# Altium PCB smoothPCB.pcbdoc (part 1 of 2)
Units mm, origin at the board's own origin, x right, y up, seen from the top; angles counter-clockwise.
Board outline 116.3 x 89.84 mm, 2 copper layers (Top Layer, Bottom Layer); 42 components, 86 nets, 257 pads, 168 vias.
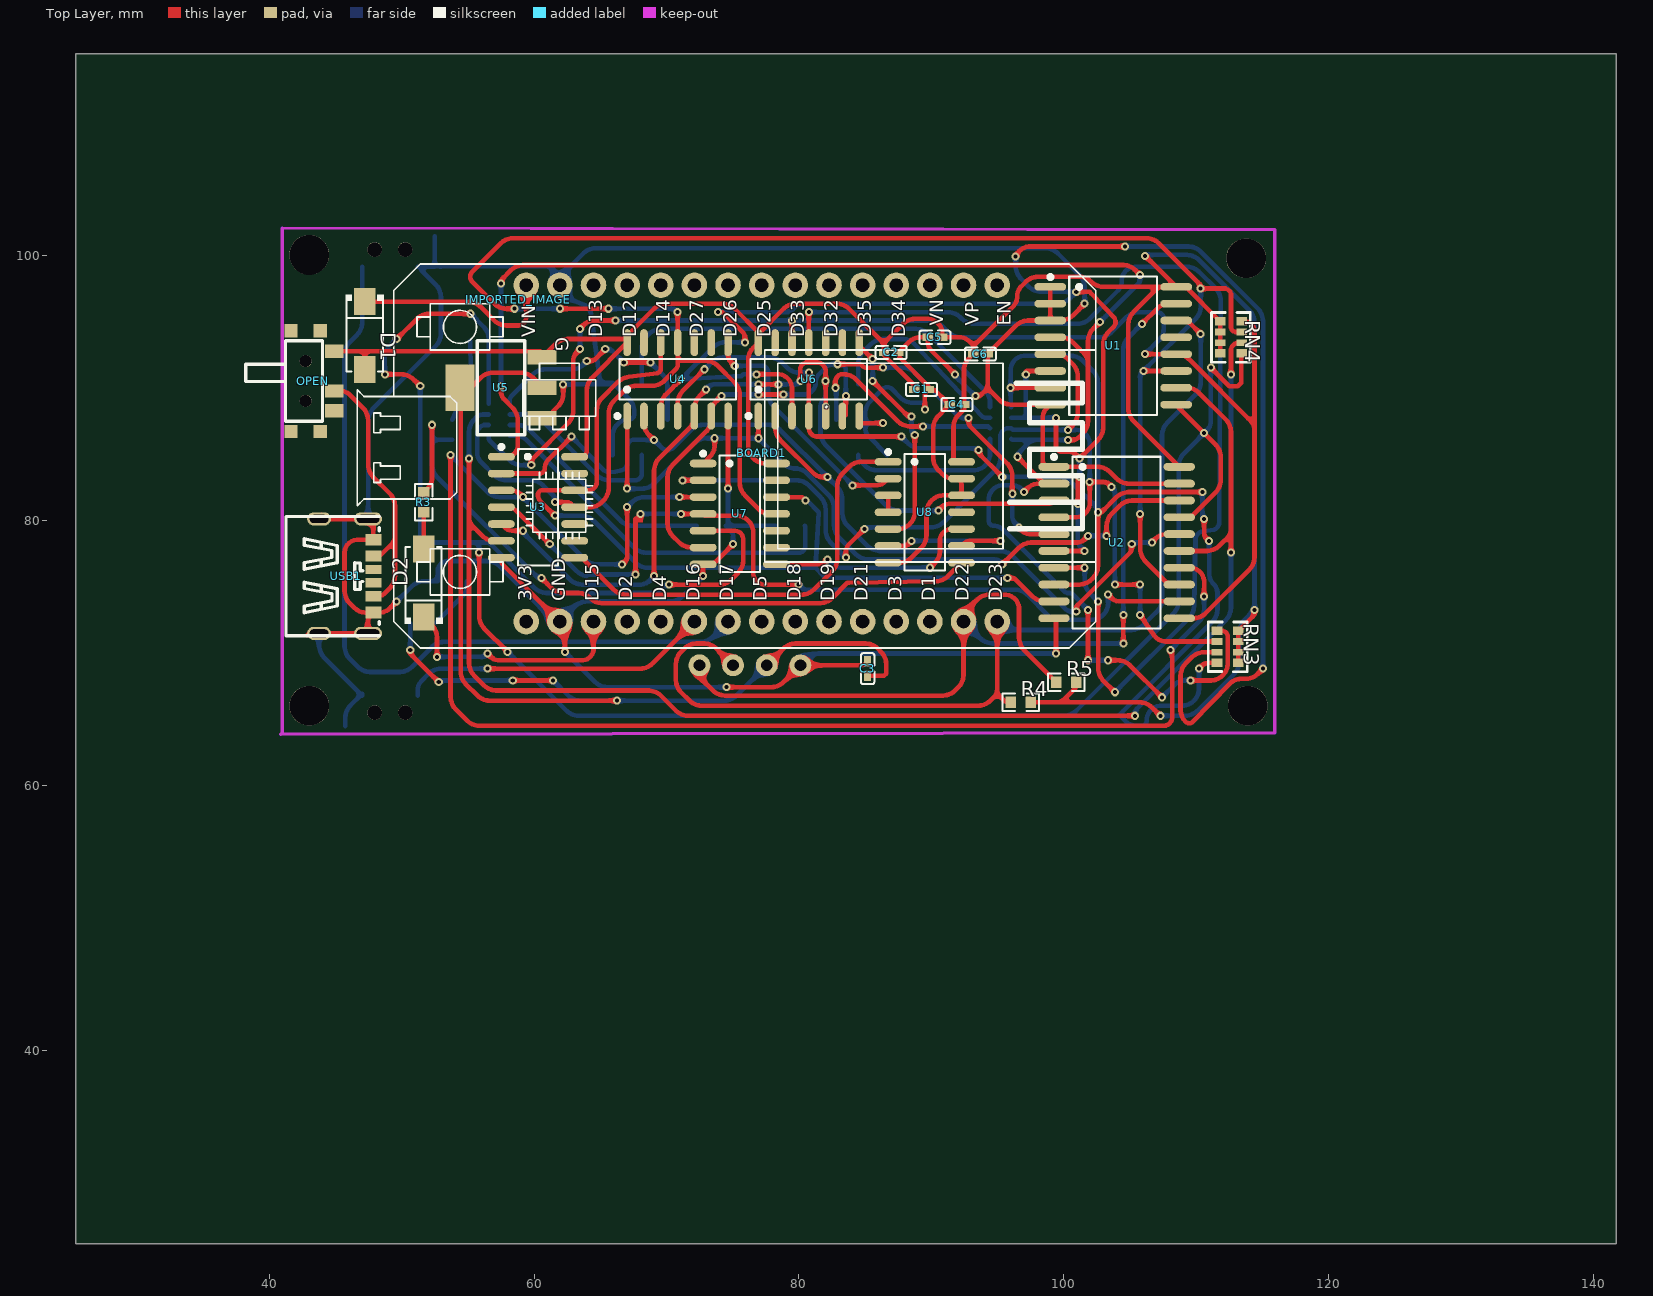
[diagram p0: Top Layer view]
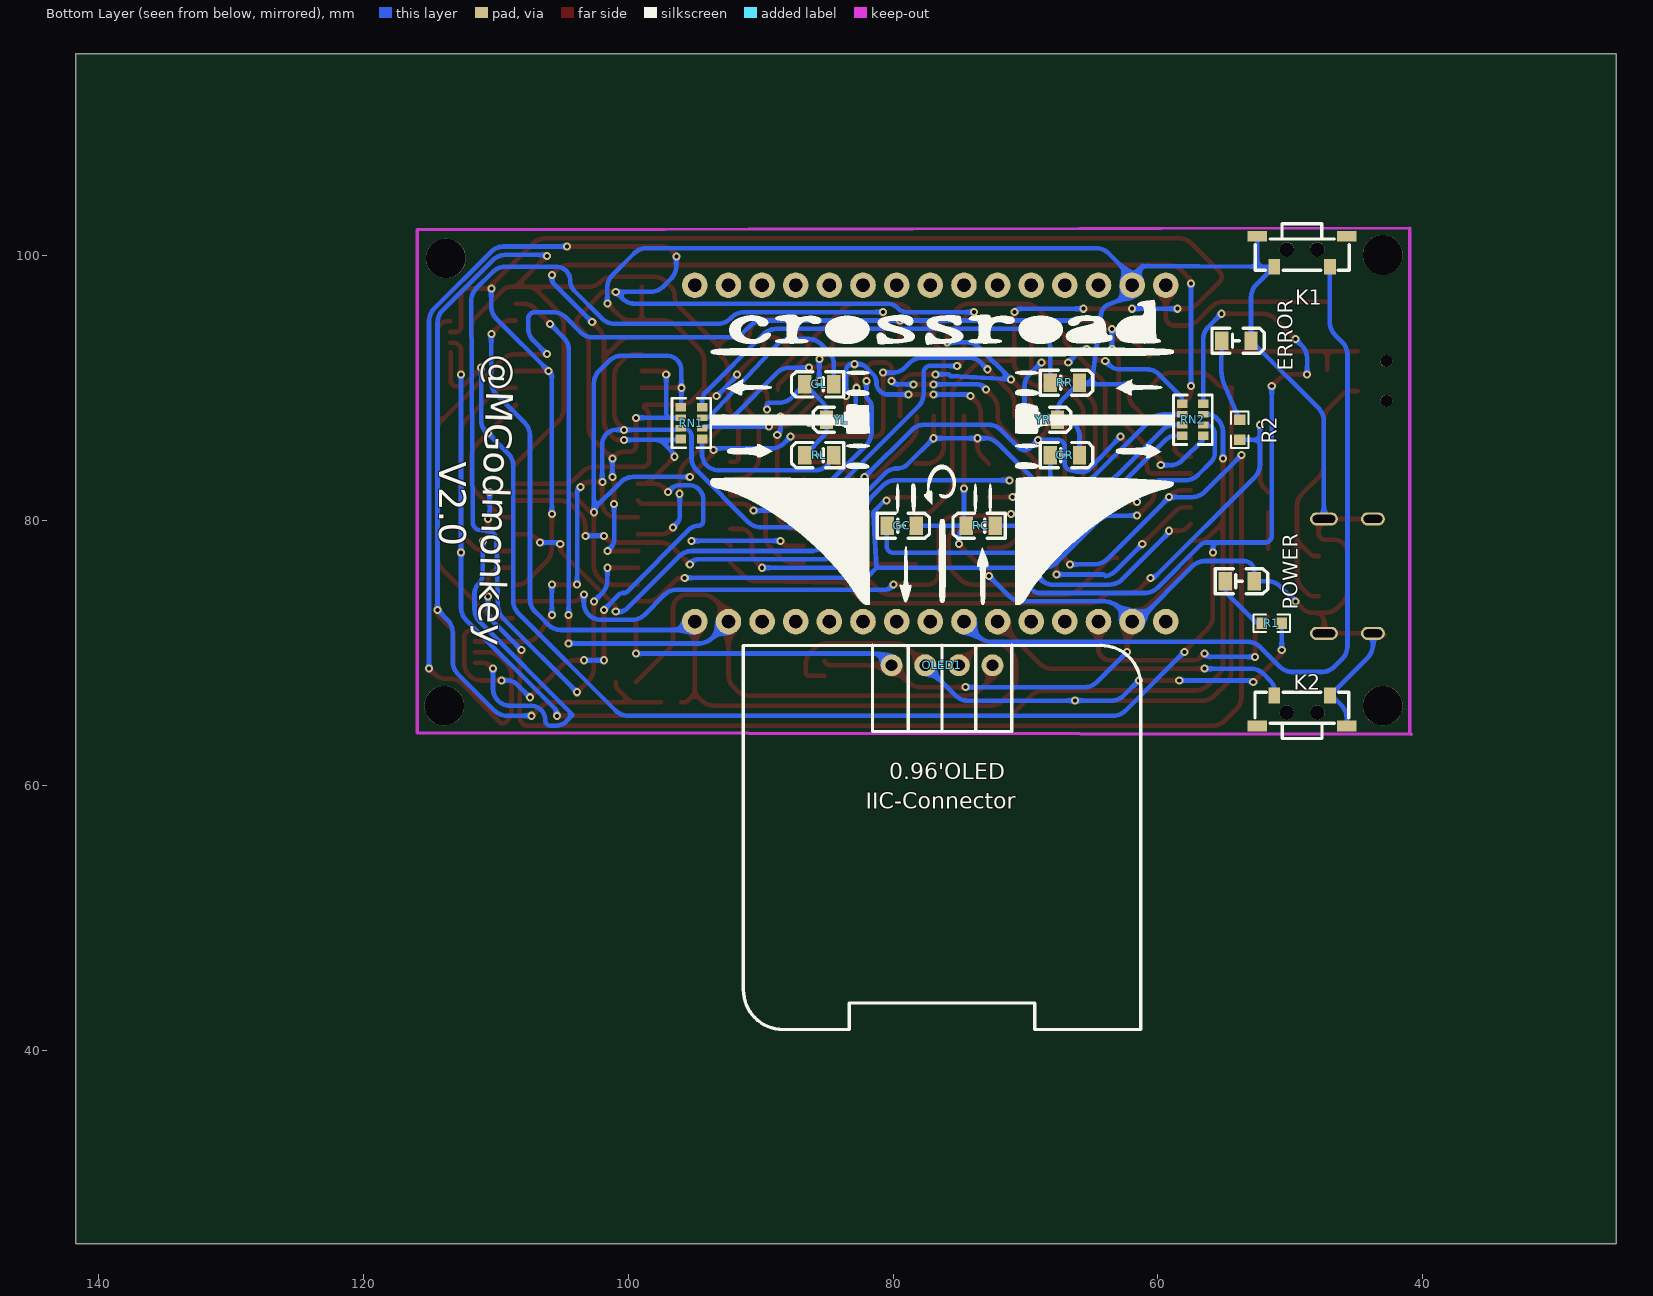
[diagram p1: Bottom Layer view, seen from below]

## Layer stack, top to bottom
Top Layer: signal copper (thickness not stored)
Dielectric: dielectric 0.32, FR-4, Dk 4.8
Bottom Layer: signal copper (thickness not stored)

## Board outline
141.701,25.4 25.4,25.4 25.4,115.245 141.701,115.245

## Components (designator, comment, footprint, x,y, rotation, side; value= is the part's Value field where it differs from the comment)
BOARD1 "ESP32DEVKITV1" ESP32-DEVKITV1 59.405,72.378 r0 top
C1 "100nF" C0402 89.25,89.904 r180 top
C2 "100nF" C0402 86.964,92.698 r0 top
C3 "100nF" C0402 85.186,68.822 r90 top
C4 "100nF" C0402 91.917,88.761 r0 top
C5 "100nF" C0402 90.266,93.841 r0 top
C6 "100nF" C0402 93.695,92.571 r0 top
D1 "SS34" SMA_L4.4-W2.8-LS5.4-RD 47.213,93.968 r270 top
D2 "SS34" SMA_L4.4-W2.8-LS5.4-RD 51.658,75.299 r90 top
ERROR "17-21SURC/S530-A2/TR8" LED0805-RD 54.071,93.587 r180 bottom
GC "17-21SURC/S530-A2/TR8" LED0805-RD 79.344,79.617 r180 bottom
GL "17-21SURC/S530-A2/TR8" LED0805-RD 85.567,90.285 r0 bottom
GR "17-21SURC/S530-A2/TR8" LED0805-RD 67.025,84.951 r180 bottom
IMPORTED_IMAGE "IMPORTED_IMAGE" IMPORTED_IMAGE 58.795,96.659 r0 top
K1 "KH-3635-CAJ" SW-SMD_KH-3635-CAJ 49.118,100.318 r180 bottom
K2 "KH-3635-CAJ" SW-SMD_KH-3635-CAJ 49.118,65.647 r0 bottom
OLED1 "0.96OLED_4P" 0.96OLED_4P 76.296,69.076 r0 bottom
OPEN "SK-3296S-01-L1" SW-SMD_3P-P1.50_L2.7-W6.6 43.276,90.539 r270 top
POWER "17-21SYGC/S530-E3/TR8" LED0805-RD 53.818,75.426 r180 bottom
R1 "510" R0603#1 51.404,72.251 r0 bottom
R2 "1k" R0603#1 53.817,86.856 r90 bottom
R3 "1k" R0603#2 51.658,81.395 r270 top
R4 "4.7k" R0603#2 96.743,66.282 r0 top
R5 "4.7k" R0603#2 100.172,67.806 r0 top
RC "17-21SURC/S530-A2/TR8" LED0805-RD 73.375,79.617 r0 bottom
RL "17-21SURC/S530-A2/TR8" LED0805-RD 85.567,84.951 r0 bottom
RN1 "1k" RES-ARRAY-SMD_0603-8P-L3.2-W1.6-BL#1 95.219,87.364 r270 bottom
RN2 "1k" RES-ARRAY-SMD_0603-8P-L3.2-W1.6-BL#1 57.373,87.618 r90 bottom
RN3 "1k" RES-ARRAY-SMD_0603-8P-L3.2-W1.6-BL#2 112.364,70.473 r270 top
RN4 "1k" RES-ARRAY-SMD_0603-8P-L3.2-W1.6-BL#2 112.618,93.841 r90 top
RR "17-21SURC/S530-A2/TR8" LED0805-RD 67.025,90.412 r180 bottom
U1 "PCF8574T/3,518" SOIC-16_L10.3-W7.5-P1.27-LS10.3-BL 103.728,93.206 r270 top
U2 "74HC240D,653" SOIC-20_L13.0-W7.6-P1.27-LS10.6-BL 103.982,78.347 r270 top
U3 "74HC30D,653" SOIC-14_L8.7-W3.9-P1.27-LS6.0-BL 60.294,81.014 r270 top
U4 "74HC30D,653" SOIC-14_L8.7-W3.9-P1.27-LS6.0-BL 70.835,90.666 r0 top
U5 "AMS1117-3.3_C347222" SOT-223_L6.7-W3.5-P2.30-BR 57.5,90.031 r0 top
U6 "74HC30D,653" SOIC-14_L8.7-W3.9-P1.27-LS6.0-BL 80.741,90.666 r0 top
U7 "74HC30D,653" SOIC-14_L8.7-W3.9-P1.27-LS6.0-BL 75.534,80.506 r270 top
U8 "74HC08D,653" SOIC-14_L8.7-W3.9-P1.27-LS6.0-BL 89.504,80.633 r270 top
USB1 "KH-TYPE-C-6P" TYPE-C-SMD_TYPE-C-31-M-16 45.816,75.807 r270 top
YL "17-21SURC/S530-A2/TR8" LED0805-RD 83.916,87.618 r0 bottom
YR "17-21SURC/S530-A2/TR8" LED0805-RD 68.676,87.618 r180 bottom

## Footprints (in the part's own frame and the unit in brackets; to place one, negate y for a bottom-side part, rotate by r counter-clockwise, add the part's x,y. Pads: shape width x height; smd on the part's side, far side on the other; paste and mask are expansions set on the pad)
0.96OLED_4P [mm]
  round 1.65 hole 0.89: 1(3.81,0.001) 2(1.27,-0.002) 3(-1.27,-0.002) 4(-3.81,-0.002)
  silkscreen extent -15,-1.5 15,27.5
C0402 [mm]
  rect 0.79x0.54 smd: 1(-0.545,0) 2(0.545,0)
  silkscreen extent -1.17,-0.5 1.17,0.5
ESP32-DEVKITV1 [mil]
  round 76 hole 39.36: 3V3(0,0) D1(1200,0) D2(300,0) D3(1100,0) D4(400,0) D5(700,0) D12(300,1000) D13(200,1000) D14(400,1000) D15(200,0) D16(500,0) D17(600,0) D18(800,0) D19(900,0) D21(1000,0) D22(1300,0) D23(1400,0) D25(700,1000) D26(600,1000) D27(500,1000) D32(900,1000) D33(800,1000) D34(1100,1000) D35(1000,1000) EN(1400,1000) GND(100,1000) GND@1(100,0) VIN(0,1000) VN(1200,1000) VP(1300,1000)
  silkscreen extent -502,-79 1693,1063
IMPORTED_IMAGE [mm]
LED0805-RD [mm]
  rect 1x1.4 smd: 1(1.1,0) 2(-1.1,0)
  silkscreen extent -1.85,-0.95 2.1,0.95
R0603#1 [mm]
  rect 0.806x0.864 smd: 1(0.753,0) 2(-0.753,0)
  silkscreen extent -1.39,-0.66 1.39,0.66
R0603#2 [mm]
  rect 0.806x0.864 smd: 1(-0.753,0) 2(0.753,0)
  silkscreen extent -1.39,-0.66 1.39,0.66
RES-ARRAY-SMD_0603-8P-L3.2-W1.6-BL#1 [mm]
  rect 0.65x0.8 smd: 1(1.2,0.8) 4(-1.2,0.8) 5(-1.2,-0.8) 8(1.2,-0.8)
  rect 0.5x0.8 smd: 2(0.4,0.8) 3(-0.4,0.8) 6(-0.4,-0.8) 7(0.4,-0.8)
  silkscreen extent -1.87,-1.47 1.87,1.45
RES-ARRAY-SMD_0603-8P-L3.2-W1.6-BL#2 [mm]
  rect 0.65x0.8 smd: 1(-1.2,-0.8) 4(1.2,-0.8) 5(1.2,0.8) 8(-1.2,0.8)
  rect 0.5x0.8 smd: 2(-0.4,-0.8) 3(0.4,-0.8) 6(0.4,0.8) 7(-0.4,0.8)
  silkscreen extent -1.87,-1.45 1.87,1.47
SMA_L4.4-W2.8-LS5.4-RD [mm]
  rect 2.046x1.62 smd: 1(-2.566,0) 2(2.565,0)
  silkscreen extent -3.08,-1.44 2.7,1.44
SOIC-14_L8.7-W3.9-P1.27-LS6.0-BL [mm]
  oval 0.574x2.038 smd: 1(-3.81,-2.769) 2(-2.54,-2.769) 3(-1.27,-2.769) 4(0,-2.769) 5(1.27,-2.769) 6(2.54,-2.769) 7(3.81,-2.769) 8(3.81,2.769) 9(2.54,2.769) 10(1.27,2.769) 11(0,2.769) 12(-1.27,2.769) 13(-2.54,2.769) 14(-3.81,2.769)
  silkscreen extent -4.7,-2.92 4.4,1.52
SOIC-16_L10.3-W7.5-P1.27-LS10.3-BL [mm]
  oval 0.574x2.401 smd: 1(-4.445,-4.75) 2(-3.175,-4.75) 3(-1.905,-4.75) 4(-0.635,-4.75) 5(0.635,-4.75) 6(1.905,-4.75) 7(3.175,-4.75) 8(4.445,-4.75) 9(4.445,4.75) 10(3.175,4.75) 11(1.905,4.75) 12(0.635,4.75) 13(-0.635,4.75) 14(-1.905,4.75) 15(-3.175,4.75) 16(-4.445,4.75)
  silkscreen extent -5.33,-4.9 5.23,3.32
SOIC-20_L13.0-W7.6-P1.27-LS10.6-BL [mm]
  oval 0.595x2.36 smd: 1(-5.715,-4.73) 2(-4.445,-4.73) 3(-3.175,-4.73) 4(-1.905,-4.73) 5(-0.635,-4.73) 6(0.635,-4.73) 7(1.905,-4.73) 8(3.175,-4.73) 9(4.445,-4.73) 10(5.715,-4.73) 11(5.715,4.73) 12(4.445,4.73) 13(3.175,4.73) 14(1.905,4.73) 15(0.635,4.73) 16(-0.635,4.73) 17(-1.905,4.73) 18(-3.175,4.73) 19(-4.445,4.73) 20(-5.715,4.73)
  silkscreen extent -6.61,-4.88 6.48,3.32
SOT-223_L6.7-W3.5-P2.30-BR [mm]
  rect 2.2x1.1 smd: 1(3.099,-2.3) 2(3.099,0) 3(3.099,2.3)
  rect 2.2x3.5 smd: 4(-3.099,0)
  silkscreen extent -1.8,-3.55 1.8,3.55
SW-SMD_3P-P1.50_L2.7-W6.6 [mm]
  rect 1x1 smd: 0(-3.8,-1.625) 0(-3.8,0.575) 0(3.8,-1.625) 0(3.8,0.575)
  rect 1x1.4 smd: 1(-2.25,1.625) 2(0.75,1.625) 3(2.25,1.625)
  round 0.9 hole 0.9 unplated: ""(-1.5,-0.525) ""(1.5,-0.525)
  silkscreen extent -3.05,-5.05 3.05,0.75
SW-SMD_KH-3635-CAJ [mm]
  rect 0.9x1.2 smd: 1(2.1,-1.15) 2(-2.1,-1.15)
  rect 1.45x0.8 smd: 3(3.375,1.15) 4(-3.375,1.15)
  round 1.1 hole 1.1 unplated: ""(-1.15,0.15) ""(1.15,0.15)
  silkscreen extent -3.53,-1.4 3.55,2.1
TYPE-C-SMD_TYPE-C-31-M-16 [mm]
  oval 1x2.1 hole 0.6 slot 1.7 at 90 deg: 1(-4.32,1.65) 2(4.32,1.65)
  oval 1x1.8 hole 0.6 slot 1.4 at 90 deg: 3(-4.32,-2.05) 4(4.32,-2.05)
  rect 0.7x1.2 smd: A5(-0.5,2.05) B5(0.5,2.05)
  rect 0.8x1.2 smd: A9(1.52,2.05) B9(-1.52,2.05)
  rect 0.9x1.2 smd: A12(2.75,2.05) B12(-2.75,2.05)
  silkscreen extent -4.5,-4.55 4.5,2.49

## Free pads (board coordinates)
  round 3 hole 3 unplated: ""(43.022,66.028) ""(43.022,100.064) ""(113.761,99.81) ""(113.888,66.028)

## Via types
v1: diameter 0.61, hole 0.305, Top Layer to Bottom Layer, 168 vias

## Nets (pads, with @x,y where several pads share a name; then routed paths per layer and width w, separated by ;. In a path a pad name is that pad's centre, name@x,y a point inside that pad or via, vN(x,y) a via of type N, cw(c..) or ccw(c..) an arc to the next point about the centre after c; other vN are vias at no path point)
+3.3V: C3.1 OLED1.2 R1.2 U5.2 U5.4 | length 86.6
  Top Layer w0.35: v1(50.651,70.219) 50.651,69.956 v1(52.801,67.806) ; U5.4@54.452,89.559 cw(c54.924,89.559) U5.4@54.924,90.031 ; v1(58.389,67.933) v1(61.437,67.933) ; U5.2@60.599,90.031 60.599,90.107 59.894,90.812 59.788,90.899 59.673,90.976 59.551,91.041 59.424,91.094 59.292,91.134 59.157,91.16 59.02,91.174 56.869,91.174 56.732,91.16 56.597,91.134 56.465,91.094 56.338,91.041 56.216,90.976 56.101,90.899 55.995,90.812 55.419,90.236 55.269,90.136 55.101,90.066 U5.4@54.924,90.031 ; v1(66.263,66.409) 56.615,66.409 56.478,66.422 56.343,66.449 56.211,66.489 56.084,66.542 55.962,66.607 55.847,66.684 55.741,66.771 54.814,67.698 54.727,67.804 54.65,67.919 54.585,68.041 54.532,68.168 54.492,68.3 54.465,68.435 54.452,68.572 U5.4@54.452,89.98 ; OLED1.2@77.566,69.078 78.854,70.365 78.96,70.452 79.075,70.529 79.196,70.594 79.324,70.647 79.455,70.687 79.591,70.713 79.728,70.727 85.055,70.727 85.192,70.713 85.327,70.687 85.459,70.647 85.586,70.594 85.708,70.529 85.823,70.452 85.929,70.365 86.221,70.073 86.308,69.967 86.385,69.852 86.45,69.73 86.503,69.603 86.543,69.471 86.569,69.336 86.583,69.199 86.583,68.441 86.419,68.277 C3.1@85.186,68.277 ; U5.4@54.452,89.98 U5.4@54.401,90.031 U5.4@54.452,90.031 ; U5.4@54.452,89.98 U5.4@54.452,90.031 ; U5.4@54.452,90.031 U5.4@54.924,90.031
  Bottom Layer w0.35: v1(50.651,70.219) R1.2@50.651,72.251 ; v1(52.801,67.806) 52.928,67.933 v1(58.389,67.933) ; v1(61.437,67.933) 62.599,66.771 62.705,66.684 62.82,66.607 62.942,66.542 63.069,66.489 63.201,66.449 63.336,66.422 63.473,66.409 v1(66.263,66.409) 74.386,66.409 74.523,66.422 74.658,66.449 74.79,66.489 74.917,66.542 75.039,66.607 75.153,66.684 75.26,66.771 OLED1.2@77.566,69.078
+5V: C1.2 C2.1 C4.2 C5.2 C6.1 D1.2 OPEN.1 R4.2 R5.2 RN3.5 RN3.6 RN3.7 RN3.8 RN4.5 RN4.6 RN4.7 RN4.8 U1.16 U2.20 U3.14 U4.14 U5.3 U6.14 U7.14 U8.14 | length 210.5
  Top Layer w0.35: OPEN.1@44.901,92.789 47.218,92.789 ; 46.74,92.789 cw(c46.74,92.313) D1.2@47.216,92.312 ; D1.2@47.213,91.403 47.218,92.789 ; D1.2@47.216,92.313 cw(c47.694,92.311) 47.694,92.789 ; U3.14@63.063,84.824 63.611,84.824 63.779,84.894 63.907,85.022 63.977,85.19 63.977,89.874 63.99,90.012 64.017,90.147 64.057,90.279 64.11,90.406 64.175,90.528 64.252,90.642 64.339,90.749 66.974,93.383 67.025,93.507 U4.14@67.025,93.714 ; 76.657,94.496 ccw(c76.995,94.833) 77.332,94.496 ; U7.14@78.303,84.316 77.406,84.316 77.279,84.328 77.153,84.353 77.031,84.391 76.913,84.439 76.8,84.5 76.694,84.571 76.595,84.652 76.505,84.742 76.424,84.841 76.353,84.947 76.292,85.06 76.244,85.178 76.206,85.3 76.182,85.426 76.169,85.553 76.169,92.198 76.182,92.325 76.206,92.451 76.244,92.573 76.292,92.691 76.353,92.804 76.424,92.91 76.505,93.009 76.753,93.257 76.84,93.388 76.9,93.533 76.931,93.687 U6.14@76.931,94.095 ; 86.055,93.734 ccw(c86.393,94.071) 86.73,93.734 ; 86.153,93.636 cw(c85.514,92.997) 86.418,92.997 ; C2.1@86.418,92.857 ccw(c87.322,92.857) 86.683,92.217 ; 86.418,93.047 cw(c87.322,93.047) 86.683,93.687 ; C1.2@88.705,89.904 88.704,90.12 88.65,90.25 86.418,92.482 C2.1@86.419,92.698 86.418,93.371 ; 92.235,88.189 ccw(c91.683,88.741) C4.2@92.463,88.741 ; U8.14@92.273,84.443 91.907,84.443 91.795,84.489 91.709,84.575 91.663,84.687 91.663,87.119 91.676,87.253 91.702,87.384 91.741,87.513 91.793,87.637 91.856,87.755 91.93,87.867 92.016,87.971 92.463,88.418 C4.2@92.463,88.761 ; C4.2@92.462,88.761 92.462,91.513 92.507,91.739 92.595,91.953 92.724,92.145 92.988,92.409 93.067,92.527 93.121,92.658 C6.1@93.149,92.798 ; 92.85,93.543 ccw(c93.187,93.881) 93.524,93.543 ; 93.411,93.429 ccw(c94.042,92.798) C6.1@93.149,92.798 ; R4.2@97.496,66.282 99.791,66.282 ; 99.416,66.282 ccw(c99.416,67.186) 100.056,66.547 ; 100.303,66.794 ccw(c100.515,66.582) 100.515,66.282 ; R5.2@100.925,67.806 100.925,67.518 100.854,67.345 99.791,66.282 ; v1@106.141,100.064 v1(106.141,99.988) U1.16@108.478,97.651 ; 106.432,97.651 cw(c106.432,97.351) 106.645,97.139 ; 106.892,97.386 cw(c107.531,96.747) U1.16@107.531,97.651 ; v1(107.284,65.266) 106.63,65.92 106.524,66.007 106.409,66.084 106.287,66.149 106.16,66.202 106.028,66.242 105.893,66.268 105.756,66.282 99.791,66.282 ; U1.16@107.754,97.651 ccw(c107.754,97.951) 107.966,98.163 ; U1.16@108.213,97.916 ccw(c108.853,98.555) U1.16@108.853,97.651 ; U2.20@108.712,84.062 105.233,87.54 105.146,87.647 105.069,87.761 105.004,87.883 104.951,88.01 104.911,88.142 104.884,88.277 104.871,88.415 104.871,94.853 104.884,94.99 104.911,95.125 104.951,95.257 105.004,95.384 105.069,95.506 105.146,95.621 105.233,95.727 107.157,97.651 ; RN4.8@111.818,92.641 RN4.7@111.818,93.441 RN4.6@111.818,94.241 111.818,94.736 111.781,94.923 111.708,95.098 111.603,95.256 109.405,97.454 109.26,97.551 109.1,97.617 108.93,97.651 U1.16@108.478,97.651 ; RN3.5@113.164,69.273 RN3.6@113.164,70.073 RN3.7@113.164,70.873 113.164,71.368 113.201,71.555 113.274,71.73 113.379,71.888 114.329,72.838 114.396,72.999 v1(114.396,73.267) ; 47.218,92.789 60.464,92.789 60.599,92.655 60.599,92.449 60.683,92.414 61.621,93.352 61.728,93.439 61.842,93.516 61.964,93.581 62.091,93.634 62.223,93.674 62.358,93.7 62.495,93.714 U4.14@67.025,93.714 ; U4.14@67.025,93.714 67.025,93.902 67.072,94.015 69.076,96.019 69.182,96.106 69.297,96.183 69.419,96.248 69.546,96.301 69.678,96.341 69.813,96.367 69.95,96.381 74.26,96.381 74.397,96.367 74.532,96.341 74.664,96.301 74.791,96.248 74.913,96.183 75.028,96.106 75.134,96.019 U6.14@76.931,94.222 ; U6.14@76.931,94.095 U6.14@76.931,94.222 ; U6.14@76.931,94.095 U6.14@76.994,94.158 ; U6.14@76.931,94.222 U6.14@76.994,94.158 ; U6.14@76.994,94.158 78.855,96.019 78.961,96.106 79.076,96.183 79.198,96.248 79.325,96.301 79.457,96.341 79.592,96.367 79.729,96.381 82.896,96.381 83.033,96.367 83.168,96.341 83.3,96.301 83.427,96.248 83.549,96.183 83.664,96.106 83.77,96.019 86.392,93.396 ; 86.392,93.396 86.418,93.371 ; 86.392,93.396 86.418,93.422 ; 86.418,93.371 86.418,93.422 ; 86.418,93.422 87.872,94.876 87.978,94.963 88.093,95.04 88.215,95.105 88.342,95.158 88.474,95.198 88.609,95.224 88.746,95.238 89.776,95.238 89.998,95.194 90.207,95.107 90.396,94.981 90.617,94.76 90.713,94.617 90.781,94.452 90.812,94.295 90.812,94.131 90.867,93.998 90.969,93.896 91.102,93.841 92.23,93.841 92.427,93.802 92.613,93.725 92.779,93.613 93.149,93.244 ; C6.1@93.149,92.798 93.149,93.168 ; 93.149,93.168 93.225,93.244 ; 93.149,93.168 93.149,93.244 ; 93.149,93.244 93.225,93.244 ; 93.225,93.244 96.249,96.268 96.367,96.444 96.448,96.639 96.489,96.847 96.489,97.058 96.53,97.265 96.611,97.461 96.729,97.637 97.143,98.051 97.249,98.138 97.364,98.215 97.486,98.28 97.613,98.333 97.745,98.373 97.88,98.399 98.017,98.413 101.221,98.413 101.348,98.4 101.474,98.375 101.596,98.338 101.714,98.289 101.827,98.229 101.933,98.158 102.032,98.077 102.122,97.987 102.221,97.906 102.327,97.835 102.44,97.774 102.558,97.726 102.68,97.688 102.806,97.663 102.933,97.651 107.157,97.651 ; 107.157,97.651 U1.16@108.478,97.651
  Bottom Layer w0.35: v1(106.141,99.988) 106.217,100.064 109.312,100.064 109.449,100.05 109.584,100.024 109.716,99.984 109.843,99.931 109.965,99.866 110.08,99.789 110.186,99.702 114.034,95.854 114.121,95.748 114.198,95.633 114.263,95.511 114.316,95.384 114.356,95.252 114.382,95.117 114.396,94.98 v1(114.396,73.267) 113.615,72.486 113.528,72.38 113.451,72.265 113.386,72.143 113.333,72.016 113.293,71.884 113.266,71.749 113.253,71.612 113.253,69.334 113.239,69.197 113.213,69.062 113.173,68.93 113.12,68.803 113.055,68.681 112.978,68.566 112.891,68.46 110.059,65.628 109.953,65.541 109.838,65.464 109.716,65.399 109.589,65.346 109.457,65.306 109.322,65.279 109.185,65.266 v1(107.284,65.266) ; 114.131,73.002 ccw(c113.491,73.641) 114.396,73.641
A: RN1.8 RN3.1 U1.4 U2.2 U3.1 | length 132.6
  Top Layer w0.35: v1(57.5,90.158) 57.5,89.686 57.535,89.509 57.605,89.341 57.705,89.191 58.408,88.488 58.495,88.382 58.572,88.267 58.637,88.145 58.69,88.018 58.73,87.886 58.756,87.751 58.77,87.614 58.77,85.332 58.456,85.018 58.314,84.923 58.156,84.857 57.988,84.824 U3.1@57.525,84.824 ; v1(57.5,97.905) 57.5,98.093 57.547,98.206 58.281,98.94 58.387,99.027 58.502,99.104 58.624,99.169 58.751,99.222 58.883,99.262 59.018,99.288 59.155,99.302 104.523,99.302 104.65,99.289 104.776,99.264 104.898,99.227 105.016,99.178 105.129,99.118 105.235,99.047 105.334,98.966 v1(105.76,98.54) ; 58.505,85.067 ccw(c57.866,85.706) 58.77,85.706 ; v1(96.489,84.824) U2.2@98.521,82.792 ; v1(96.997,82.157) 97.392,82.552 97.568,82.67 97.763,82.751 97.971,82.792 U2.2@98.521,82.792 ; U2.2@98.256,83.057 ccw(c98.895,83.696) U2.2@98.895,82.792 ; U1.4@98.978,93.841 99.787,93.841 99.924,93.827 100.059,93.801 100.191,93.761 100.318,93.708 100.44,93.643 100.555,93.566 100.661,93.479 101.823,92.317 ; U2.2@99.252,82.792 U2.2@98.521,82.792 ; v1(100.299,86.094) 100.692,86.094 100.84,86.123 100.98,86.181 101.105,86.265 101.461,86.621 101.548,86.727 101.625,86.842 101.69,86.964 101.743,87.091 101.783,87.223 101.809,87.358 101.823,87.495 101.823,92.317 ; 101.311,92.829 ccw(c101.523,93.041) 101.823,93.041 ; 101.558,92.582 cw(c100.919,91.942) 101.823,91.942 ; v1(101.823,69.457) v1(101.823,73.267) ; v1(102.712,94.984) 102.185,94.457 102.098,94.351 102.021,94.236 101.956,94.114 101.903,93.987 101.863,93.855 101.836,93.72 101.823,93.583 101.823,92.317 ; v1(103.347,69.457) 104.105,69.457 104.242,69.443 104.377,69.417 104.509,69.377 104.636,69.324 104.758,69.259 104.873,69.182 104.979,69.095 v1(107.411,66.663) ; v1(109.57,67.933) 111.137,67.933 111.263,67.945 111.387,67.97 111.509,68.007 111.626,68.055 111.738,68.115 111.843,68.186 111.941,68.266 112.031,68.356 112.111,68.454 112.182,68.559 112.241,68.671 112.29,68.788 112.327,68.91 112.352,69.034 112.364,69.16 112.364,71.324 112.298,71.484 112.176,71.606 112.017,71.672 RN3.1@111.564,71.672
  Bottom Layer w0.35: v1(57.5,90.158) v1(57.5,97.905) ; RN1.8@96.019,86.164 96.09,86.094 97.575,86.094 ; v1(96.489,84.824) 96.489,85.008 97.575,86.094 ; 96.85,86.094 cw(c96.85,85.794) 97.063,85.582 ; v1(96.997,82.157) 96.683,82.471 96.541,82.566 96.383,82.632 96.215,82.665 95.307,82.665 95.098,82.623 94.901,82.542 94.723,82.423 94.572,82.272 94.453,82.094 94.372,81.897 94.33,81.688 94.33,79.922 94.388,79.782 94.495,79.675 94.635,79.617 94.808,79.617 94.973,79.584 95.147,79.512 95.297,79.412 100.102,74.607 100.271,74.537 100.454,74.537 100.623,74.467 v1(101.823,73.267) ; 97.31,85.829 cw(c97.949,85.19) 97.949,86.094 ; v1(100.299,86.094) 97.759,86.094 97.575,86.094 ; v1(101.823,69.457) v1(103.347,69.457) ; v1(102.712,94.984) 105.667,97.939 105.76,98.164 v1(105.76,98.54) ; v1(107.411,66.663) 108.441,67.693 108.617,67.811 108.812,67.892 109.02,67.933 v1(109.57,67.933)
A`: U2.18 U4.1 U6.1 U7.1 | length 60.8
  Top Layer w0.35: v1(67.025,82.411) U4.1@67.025,87.897 ; U7.1@72.765,84.316 73.348,84.9 73.486,85.105 73.581,85.334 73.629,85.577 v1(73.629,86.221) ; v1(76.931,86.221) U6.1@76.931,87.897 ; v1(95.346,76.696) 96.635,77.985 96.741,78.072 96.856,78.149 96.978,78.214 97.105,78.267 97.237,78.307 97.372,78.333 97.509,78.347 101.041,78.347 101.209,78.38 101.367,78.446 101.509,78.541 v1(101.823,78.855) ; v1(103.22,78.855) 103.22,79.613 103.233,79.75 103.26,79.885 103.3,80.017 103.353,80.144 103.418,80.266 103.495,80.381 103.582,80.487 104.255,81.16 104.361,81.247 104.476,81.324 104.598,81.389 104.725,81.442 104.857,81.482 104.992,81.508 105.129,81.522 U2.18@108.712,81.522
  Bottom Layer w0.35: v1(67.025,82.411) 68.164,82.411 68.301,82.424 68.436,82.451 68.568,82.491 68.695,82.544 68.817,82.609 68.932,82.686 69.038,82.773 72.13,85.865 72.235,85.951 72.347,86.026 72.467,86.09 72.592,86.142 72.722,86.181 72.855,86.208 72.99,86.221 v1(73.629,86.221) v1(76.931,86.221) 78.943,84.209 79.144,84.075 79.367,83.982 79.604,83.935 79.846,83.935 80.083,83.888 80.306,83.795 80.507,83.661 82.284,81.884 82.371,81.778 82.448,81.663 82.513,81.541 82.566,81.414 82.606,81.282 82.632,81.147 82.646,81.01 82.646,79.621 82.659,79.484 82.686,79.349 82.726,79.217 82.779,79.09 82.844,78.968 82.921,78.853 83.008,78.747 84.316,77.439 84.422,77.352 84.537,77.275 84.659,77.21 84.786,77.157 84.918,77.117 85.053,77.09 85.19,77.077 94.76,77.077 94.885,77.052 95.004,77.003 95.11,76.932 v1(95.346,76.696) ; 76.556,86.221 cw(c76.556,85.317) 77.196,85.956 ; v1(101.823,78.855) v1(103.22,78.855)
B: RN1.7 RN3.2 U1.5 U2.4 U7.2 | length 78.5
  Top Layer w0.35: v1(71.216,83.046) U7.2@72.765,83.046 ; v1(83.535,77.204) 83.535,77.676 83.57,77.853 83.64,78.021 83.74,78.171 v1(84.932,79.363) ; U1.5@98.978,92.571 99.56,92.571 99.779,92.527 99.985,92.442 100.171,92.318 100.699,91.79 100.786,91.684 100.863,91.569 100.928,91.447 100.981,91.32 101.021,91.188 101.047,91.053 101.061,90.916 101.061,88.093 101.048,87.966 101.024,87.84 100.986,87.718 100.938,87.6 100.877,87.487 100.806,87.381 100.725,87.282 v1(100.299,86.856) ; U2.4@99.252,80.252 100.973,80.252 101.182,80.294 101.379,80.375 101.557,80.494 101.708,80.645 101.827,80.822 101.908,81.02 101.95,81.229 v1(101.95,82.919) 103.015,82.919 103.14,82.894 103.259,82.845 103.365,82.774 v1(103.601,82.538) ; 101.95,82.442 cw(c102.427,82.442) 102.427,82.919 ; v1(103.855,75.172) v1(105.76,75.172) ; v1(105.76,72.886) 106.853,71.289 106.94,71.19 107.038,71.103 107.146,71.028 107.262,70.967 107.384,70.92 107.511,70.889 107.642,70.873 RN3.2@111.564,70.873
  Bottom Layer w0.35: v1(71.216,83.046) 79.848,83.046 79.985,83.032 80.12,83.006 80.252,82.966 80.379,82.913 80.501,82.848 80.616,82.771 80.722,82.684 81.649,81.757 81.736,81.651 81.813,81.536 81.878,81.414 81.931,81.287 81.971,81.155 81.997,81.02 82.011,80.883 82.011,79.24 82.024,79.103 82.051,78.968 82.091,78.836 82.144,78.709 82.209,78.587 82.286,78.472 82.373,78.366 v1(83.535,77.204) ; v1(84.932,79.363) 85.059,79.49 90.008,79.49 90.145,79.503 90.28,79.53 90.412,79.57 90.539,79.623 90.661,79.688 90.776,79.765 90.882,79.852 94.857,83.827 94.944,83.933 95.021,84.048 95.086,84.17 95.139,84.297 95.179,84.429 95.205,84.564 95.219,84.701 95.219,86.469 95.313,86.696 95.5,86.883 95.695,86.964 RN1.7@96.019,86.964 96.127,86.856 97.886,86.856 v1(100.299,86.856) 100.973,86.856 101.182,86.814 101.379,86.733 101.557,86.614 101.708,86.463 101.827,86.285 101.908,86.088 101.95,85.879 v1(101.95,82.919) ; v1(103.601,82.538) 103.789,82.35 103.855,82.191 v1(103.855,75.172) ; v1(105.76,72.886) v1(105.76,75.172)
B`: U2.16 U3.2 U4.2 U6.2 | length 75.6
  Top Layer w0.35: U3.2@57.525,83.554 60.497,83.554 60.637,83.612 60.744,83.719 60.802,83.859 60.802,84.032 60.835,84.197 60.907,84.371 61.007,84.521 v1(62.834,86.348) ; U4.2@68.295,87.897 68.295,87.253 68.343,87.01 68.438,86.781 68.576,86.575 v1(69.057,86.094) ; U6.2@78.201,87.897 78.201,86.987 78.214,86.85 78.241,86.715 78.281,86.583 78.334,86.456 78.399,86.334 78.476,86.219 78.563,86.113 81.171,83.505 81.321,83.405 81.489,83.335 81.666,83.3 v1(82.138,83.3) ; v1(100.934,73.14) 100.934,73.422 101.004,73.591 105.032,77.619 105.125,77.844 v1(105.125,78.22) ; v1(106.649,78.347) 107.042,78.74 107.22,78.859 107.417,78.94 107.626,78.982 U2.16@108.712,78.982
  Bottom Layer w0.35: v1(62.834,86.348) 64.993,84.062 65.247,83.808 65.628,83.654 66.136,83.681 66.611,83.808 66.801,83.887 66.946,84.031 67.025,84.222 67.025,85.68 67.104,85.87 67.249,86.015 67.439,86.094 v1(69.057,86.094) 69.726,85.425 69.951,85.332 70.195,85.332 70.42,85.425 71.87,86.875 71.976,86.962 72.091,87.039 72.213,87.104 72.34,87.157 72.472,87.197 72.607,87.223 72.744,87.237 77.689,87.237 77.826,87.223 77.961,87.197 78.093,87.157 78.22,87.104 78.342,87.039 78.457,86.962 78.563,86.875 v1(82.138,83.3) 82.919,82.519 83.006,82.413 83.083,82.298 83.148,82.176 83.201,82.049 83.241,81.917 83.267,81.782 83.281,81.645 83.281,80.51 83.294,80.373 83.321,80.238 83.361,80.106 83.414,79.979 83.479,79.857 83.556,79.742 83.643,79.636 85.205,78.074 85.311,77.987 85.426,77.91 85.548,77.845 85.675,77.792 85.807,77.752 85.942,77.725 86.079,77.712 95.215,77.712 95.352,77.698 95.487,77.672 95.619,77.632 95.746,77.579 95.868,77.514 95.983,77.437 96.089,77.35 100.128,73.311 100.253,73.227 100.393,73.169 100.541,73.14 v1(100.934,73.14) ; 68.682,86.094 cw(c68.682,85.19) 69.322,85.829 ; v1(105.125,78.22) 105.252,78.347 v1(106.649,78.347)
BOARD1_3V3: BOARD1.3V3
BOARD1_D1: BOARD1.D1
BOARD1_D2: BOARD1.D2
BOARD1_D3: BOARD1.D3
BOARD1_D4: BOARD1.D4
BOARD1_D5: BOARD1.D5
BOARD1_D12: BOARD1.D12
BOARD1_D13: BOARD1.D13
BOARD1_D14: BOARD1.D14
BOARD1_D15: BOARD1.D15 D2.1 | length 18
  Top Layer w0.35: D2.1@51.658,72.733 52.312,72.08 52.399,71.973 52.476,71.858 52.541,71.737 52.594,71.61 52.634,71.478 52.66,71.343 52.674,71.205 v1(52.674,69.711) ; v1(56.484,69.965) 56.798,69.651 56.94,69.556 57.098,69.49 57.266,69.457 63.703,69.457 63.871,69.49 64.029,69.556 64.171,69.651 64.291,69.771 64.386,69.913 64.452,70.071 64.485,70.239 BOARD1.D15@64.485,72.378
  Bottom Layer w0.35: v1(52.674,69.711) 56.137,69.711 56.296,69.777 v1(56.484,69.965)
BOARD1_D18: BOARD1.D18
BOARD1_D19: BOARD1.D19
BOARD1_D21: BOARD1.D21
BOARD1_D25: BOARD1.D25
BOARD1_D26: BOARD1.D26
BOARD1_D27: BOARD1.D27
BOARD1_D32: BOARD1.D32
BOARD1_D33: BOARD1.D33
BOARD1_D34: BOARD1.D34
BOARD1_D35: BOARD1.D35
BOARD1_EN: BOARD1.EN
BOARD1_VIN: BOARD1.VIN D1.1 | length 15.6
  Top Layer w0.35: D1.1@47.213,96.533 55.057,96.533 55.195,96.52 55.33,96.493 55.462,96.453 55.589,96.4 55.711,96.335 55.825,96.259 55.932,96.171 57.011,95.092 57.117,95.005 57.232,94.928 57.354,94.863 57.481,94.81 57.613,94.77 57.748,94.743 57.885,94.73 58.819,94.73 58.944,94.755 59.063,94.804 59.169,94.875 59.26,94.966 59.331,95.072 59.38,95.191 59.405,95.316 BOARD1.VIN@59.405,97.778
BOARD1_VN: BOARD1.VN
BOARD1_VP: BOARD1.VP
C: RN1.6 RN3.3 U1.6 U2.6 U4.3 U6.3 | length 159.4
  Top Layer w0.35: U4.3@69.565,87.897 69.565,88.63 69.578,88.767 69.605,88.902 69.645,89.034 69.698,89.161 69.763,89.283 69.84,89.398 69.927,89.504 v1(71.089,90.666) ; v1(73.883,95.746) 74.223,95.746 75.829,94.141 75.885,94.001 75.915,93.854 v1(75.915,93.46) ; v1(76.804,91.047) 78.494,91.047 78.703,91.005 78.9,90.924 79.078,90.805 79.229,90.654 79.348,90.476 79.429,90.279 79.471,90.07 U6.3@79.471,87.897 ; v1(96.362,99.937) 96.362,100.064 96.755,100.457 96.933,100.576 97.13,100.657 97.339,100.699 v1(104.617,100.699) ; v1(97.124,91.047) 97.124,91.227 97.198,91.301 U1.6@98.978,91.301 ; U2.6@99.252,77.712 v1(101.569,77.712) ; v1(99.41,87.764) 99.41,85.552 99.476,85.393 99.598,85.271 99.757,85.205 100.406,85.205 100.574,85.172 100.737,85.104 100.869,85.016 100.985,84.9 101.117,84.846 101.259,84.846 101.391,84.9 102.604,86.113 102.691,86.219 102.768,86.334 102.833,86.456 102.886,86.583 102.926,86.715 102.952,86.85 102.966,86.987 102.966,93.329 102.979,93.466 103.006,93.601 103.046,93.733 103.099,93.86 103.164,93.982 103.241,94.097 103.328,94.203 103.816,94.691 103.897,94.883 103.9,95.091 103.825,95.286 102.077,97.143 101.95,97.27 v1(100.934,97.27) ; v1(101.061,81.268) 101.061,83.173 v1(101.188,83.3) ; RN3.3@111.564,70.073 110.57,70.074 110.433,70.061 110.297,70.034 110.166,69.994 110.038,69.941 109.917,69.876 109.802,69.799 109.696,69.712 109.17,69.184 109.082,69.078 109.006,68.963 108.941,68.842 108.888,68.714 108.848,68.582 108.821,68.447 108.808,68.31 108.808,65.643 108.849,65.408 108.933,65.177 109.045,64.982 109.197,64.799 109.36,64.719 109.541,64.712 109.709,64.78 112.517,67.692 112.622,67.781 112.735,67.858 112.855,67.924 112.981,67.978 113.112,68.019 113.247,68.046 113.383,68.06 113.794,68.06 113.921,68.072 114.047,68.097 114.169,68.135 114.287,68.183 114.4,68.244 114.506,68.315 114.605,68.396 v1(115.031,68.822)
  Bottom Layer w0.35: 71.626,91.203 ccw(c71.832,90.998) 71.848,90.708 ; v1(73.883,95.746) 79.169,95.746 79.211,95.788 79.408,95.869 79.586,95.988 79.737,96.139 79.914,96.258 80.112,96.339 80.321,96.381 99.533,96.381 99.67,96.394 99.805,96.421 99.937,96.461 100.064,96.514 100.186,96.579 100.301,96.656 100.407,96.743 v1(100.934,97.27) 98.271,97.27 98.134,97.283 97.999,97.31 97.867,97.35 97.74,97.403 97.618,97.468 97.503,97.545 97.397,97.632 96.724,98.305 96.637,98.411 96.56,98.526 96.495,98.648 96.442,98.775 96.402,98.907 96.375,99.042 96.362,99.179 v1(96.362,99.937) ; v1(75.915,93.46) 74.395,93.46 74.258,93.446 74.123,93.42 73.991,93.38 73.864,93.327 73.742,93.262 73.627,93.185 73.521,93.098 v1(71.089,90.666) 75.661,90.92 75.788,91.047 v1(76.804,91.047) ; RN1.6@96.019,87.764 96.889,87.764 ; v1(97.124,91.047) 97.124,88.085 97.063,87.938 96.889,87.764 ; v1(99.41,87.764) 96.889,87.764 ; 100.209,97.27 cw(c100.209,96.97) 100.422,96.758 ; v1(101.061,81.268) 101.061,78.494 101.094,78.326 101.16,78.168 101.255,78.026 v1(101.569,77.712) ; v1(101.188,83.3) v1(101.188,84.697) ; v1(104.617,100.699) 109.439,100.699 109.576,100.685 109.711,100.659 109.843,100.619 109.97,100.566 110.092,100.501 110.207,100.424 110.313,100.337 114.669,95.981 114.756,95.875 114.833,95.76 114.898,95.638 114.951,95.511 114.991,95.379 115.017,95.244 115.031,95.107 v1(115.031,68.822)
C`: U2.14 U3.3 U7.3 | length 117.3
  Top Layer w0.35: v1(53.69,84.951) 53.69,66.667 53.703,66.53 53.73,66.395 53.77,66.263 53.823,66.136 53.888,66.014 53.965,65.899 54.052,65.793 54.979,64.866 55.085,64.779 55.2,64.702 55.322,64.637 55.449,64.584 55.581,64.544 55.716,64.517 55.853,64.504 107.587,64.504 107.712,64.529 107.831,64.578 107.937,64.649 108.028,64.74 108.099,64.846 108.148,64.965 108.173,65.09 108.173,70.219 v1(108.046,70.219) ; U3.3@57.525,82.284 58.369,82.284 58.537,82.251 58.695,82.185 58.837,82.09 v1(59.151,81.776) ; v1(66.644,76.696) 66.88,76.932 66.951,77.038 67,77.157 67.025,77.282 v1(67.025,81.014) ; v1(70.962,81.776) U7.3@72.765,81.776 ; U2.14@108.712,76.442 109.609,76.442 109.818,76.4 110.015,76.319 110.193,76.2 110.344,76.049 110.463,75.871 110.544,75.674 110.586,75.465 v1(110.586,74.283)
  Bottom Layer w0.35: v1(53.69,84.951) 56.503,82.138 56.609,82.051 56.724,81.974 56.846,81.909 56.973,81.856 57.105,81.816 57.24,81.789 57.377,81.776 v1(59.151,81.776) 63.869,77.058 63.975,76.971 64.09,76.894 64.212,76.829 64.339,76.776 64.471,76.736 64.606,76.709 64.743,76.696 v1(66.644,76.696) ; 58.777,81.776 cw(c58.776,80.871) 59.416,81.511 ; v1(67.025,81.014) 67.451,81.44 67.55,81.521 67.656,81.592 67.769,81.652 67.887,81.701 68.009,81.738 68.135,81.763 68.262,81.776 v1(70.962,81.776) ; v1(108.046,70.219) 110.224,72.397 110.311,72.503 110.388,72.618 110.453,72.74 110.506,72.867 110.546,72.999 110.572,73.134 110.586,73.271 v1(110.586,74.283)
D: RN1.5 RN3.4 U1.7 U2.8 U4.4 U6.4 | length 114.6
  Top Layer w0.35: U4.4@70.835,87.897 70.835,88.884 70.848,89.021 70.875,89.156 70.915,89.288 70.968,89.415 71.033,89.537 71.11,89.652 71.197,89.758 v1(72.867,91.428) ; v1(80.741,91.174) U6.4@80.741,87.897 80.741,86.934 80.766,86.809 80.815,86.69 80.886,86.584 80.977,86.493 81.083,86.422 81.202,86.373 81.327,86.348 v1(87.726,86.348) ; v1@93.441,85.332 93.441,85.205 v1(95.346,83.3) ; v1(95.981,90.031) U1.7@98.978,90.031 ; U2.8@99.252,75.172 101.184,75.172 101.321,75.185 101.456,75.212 101.588,75.252 101.715,75.305 101.837,75.37 101.952,75.447 102.058,75.534 102.223,75.699 102.31,75.805 102.387,75.92 102.452,76.042 102.505,76.169 102.545,76.301 102.571,76.436 102.585,76.573 v1(102.585,80.633) 102.839,80.633 104.001,81.795 104.107,81.882 104.222,81.959 104.344,82.024 104.471,82.077 104.603,82.117 104.738,82.143 104.875,82.157 v1(110.459,82.157) ; v1(110.205,68.822) 110.484,69.101 110.61,69.185 110.75,69.243 110.899,69.273 RN3.4@111.564,69.273 ; v1(110.586,80.125) 110.586,79.06 110.611,78.935 110.66,78.816 110.731,78.71 v1(110.967,78.474)
  Bottom Layer w0.35: v1(72.867,91.428) 73.394,91.955 73.5,92.042 73.615,92.119 73.737,92.184 73.864,92.237 73.996,92.277 74.131,92.303 74.268,92.317 77.816,92.317 77.953,92.303 78.088,92.277 78.22,92.237 78.347,92.184 78.469,92.119 78.584,92.042 78.69,91.955 79.109,91.536 79.215,91.449 79.33,91.372 79.452,91.307 79.579,91.254 79.711,91.214 79.846,91.187 79.983,91.174 v1(80.741,91.174) ; v1(87.726,86.348) 88.253,85.821 88.359,85.734 88.474,85.657 88.596,85.592 88.723,85.539 88.855,85.499 88.99,85.472 89.127,85.459 93.441,85.459 v1(93.568,85.332) ; v1(95.346,83.3) 99.66,83.3 99.797,83.286 99.932,83.26 100.064,83.22 100.191,83.167 100.313,83.102 100.428,83.025 100.534,82.938 v1@102.585,80.887 ; RN1.5@96.019,88.564 95.981,88.602 v1(95.981,90.031) 95.981,91.467 96.023,91.676 96.104,91.873 96.223,92.051 96.374,92.202 96.552,92.321 96.749,92.402 96.958,92.444 100.549,92.444 100.686,92.43 100.821,92.404 100.953,92.364 101.08,92.311 101.202,92.246 101.317,92.169 101.423,92.082 102.223,91.282 102.31,91.176 102.387,91.061 102.452,90.939 102.505,90.812 102.545,90.68 102.571,90.545 102.585,90.408 v1@102.585,80.887 ; 102.073,81.399 ccw(c102.285,81.611) 102.585,81.611 ; v1(102.585,80.633) v1@102.585,80.887 ; 104.51,64.992 cw(c104.847,65.329) 104.51,65.667 ; v1(110.205,68.822) 110.205,67.265 110.192,67.138 110.168,67.012 110.13,66.89 110.082,66.772 110.021,66.659 109.95,66.553 109.869,66.454 109.779,66.364 109.68,66.283 109.574,66.212 109.461,66.151 109.343,66.103 109.221,66.065 109.095,66.04 108.968,66.028 107.245,66.028 107.036,65.986 106.839,65.905 106.661,65.786 106.508,65.633 106.39,65.457 106.306,65.255 106.268,65.062 106.268,64.86 106.2,64.697 106.075,64.572 105.912,64.504 105.473,64.504 105.346,64.516 105.22,64.541 105.098,64.579 104.98,64.627 104.867,64.688 104.761,64.759 104.662,64.84 104.236,65.266 104.236,65.393 111.24,72.397 111.327,72.503 111.404,72.618 111.469,72.74 111.522,72.867 111.562,72.999 111.588,73.134 111.602,73.271 111.602,74.576 111.56,74.785 111.479,74.982 111.36,75.16 111.209,75.311 111.09,75.488 111.009,75.686 110.967,75.895 v1(110.967,78.474) ; v1(110.459,82.157) 110.459,80.252 v1(110.586,80.125)
D`: U2.12 U3.4 U7.4 | length 64.5
  Top Layer w0.35: U3.4@57.525,81.014 58.06,81.014 58.261,80.974 58.451,80.895 58.622,80.781 v1(61.183,78.22) ; v1(67.66,75.934) 67.66,80.125 v1(68.041,80.506) ; v1(71.089,80.506) U7.4@72.765,80.506 72.892,80.379 75.313,80.379 75.44,80.366 75.566,80.341 75.688,80.304 75.806,80.255 75.919,80.195 76.025,80.124 76.124,80.043 76.214,79.953 76.295,79.854 76.366,79.748 76.427,79.635 76.475,79.517 76.513,79.395 76.537,79.269 76.55,79.142 76.55,75.954 76.583,75.786 76.649,75.628 76.744,75.486 76.864,75.366 77.006,75.271 77.164,75.205 77.332,75.172 v1(79.979,75.172) ; v1(103.347,74.41) 103.661,74.096 103.803,74.001 103.961,73.935 104.129,73.902 U2.12@108.712,73.902
  Bottom Layer w0.35: v1(61.183,78.22) 63.234,76.169 63.34,76.082 63.455,76.005 63.577,75.94 63.704,75.887 63.836,75.847 63.971,75.82 64.084,75.934 v1(67.66,75.934) ; v1(68.041,80.506) v1(71.089,80.506) ; v1(79.979,75.172) 80.215,74.936 80.321,74.865 80.44,74.816 80.565,74.791 96.358,74.791 96.495,74.777 96.63,74.751 96.762,74.711 96.889,74.658 97.011,74.593 97.126,74.516 97.232,74.429 98.794,72.867 98.9,72.78 99.015,72.703 99.137,72.638 99.264,72.585 99.396,72.545 99.531,72.518 99.668,72.505 102.11,72.505 102.237,72.517 102.363,72.542 102.485,72.58 102.603,72.628 102.716,72.689 102.822,72.76 102.921,72.841 103.011,72.931 103.092,73.03 103.163,73.136 103.224,73.249 103.272,73.367 103.31,73.489 103.334,73.615 103.347,73.742 v1(103.347,74.41)
DC: OPEN.2 USB1.A9 USB1.B9 | length 22.2
  Top Layer w0.35: OPEN.2@44.901,89.789 45.46,89.79 45.67,89.748 45.868,89.666 46.046,89.547 47.105,88.488 47.192,88.382 47.269,88.267 47.334,88.145 47.387,88.018 47.427,87.886 47.453,87.751 47.467,87.614 47.467,84.193 47.48,84.056 47.507,83.921 47.547,83.789 47.6,83.662 47.665,83.54 47.742,83.425 47.829,83.319 49.137,82.011 49.224,81.905 49.301,81.79 49.366,81.668 49.419,81.541 49.459,81.409 49.485,81.274 49.499,81.137 49.499,78.474 ; USB1.A9@47.866,74.287 48.251,74.288 48.396,74.317 48.533,74.374 48.656,74.456 49.137,74.937 49.224,75.043 49.301,75.158 49.366,75.28 49.419,75.407 49.459,75.539 49.485,75.674 49.499,75.811 49.499,78.093 49.499,78.474 ; USB1.B9@47.866,77.326 48.225,77.326 48.44,77.415 49.499,78.474 ; 48.987,77.962 cw(c49.199,77.749) 49.499,77.749 ; 49.234,78.209 ccw(c48.595,78.848) 49.499,78.848
E: RN2.8 RN4.1 U1.9 U2.17 U7.5 | length 165
  Top Layer w0.35: v1(48.737,91.047) 50.003,91.047 50.14,91.033 50.275,91.007 50.407,90.967 50.534,90.914 50.656,90.849 50.771,90.772 50.877,90.685 v1(51.404,90.158) ; v1(49.626,93.714) 51.169,95.257 51.275,95.344 51.39,95.421 51.512,95.486 51.639,95.539 51.771,95.579 51.906,95.605 52.043,95.619 v1(55.214,95.619) ; v1(55.849,77.585) 55.849,72.763 55.862,72.626 55.889,72.491 55.929,72.359 55.982,72.232 56.047,72.11 56.124,71.995 56.211,71.889 v1(58.008,70.092) ; v1(70.2,75.172) 74.006,75.172 74.143,75.185 74.278,75.212 74.41,75.252 74.537,75.305 74.659,75.37 74.774,75.447 74.88,75.534 75.426,76.08 75.513,76.186 75.59,76.301 75.655,76.423 75.708,76.55 75.748,76.682 75.774,76.817 75.788,76.954 75.788,78.65 75.763,78.775 75.714,78.894 75.643,79 75.552,79.091 75.446,79.162 75.327,79.211 75.202,79.236 U7.5@72.765,79.236 ; U1.9@108.478,88.761 108.478,88.71 111.494,85.694 111.581,85.588 111.658,85.473 111.723,85.351 111.776,85.224 111.816,85.092 111.842,84.957 111.856,84.82 111.856,83.05 111.842,82.913 111.816,82.778 111.776,82.646 111.723,82.519 111.658,82.397 111.581,82.282 111.494,82.176 109.801,80.483 109.632,80.37 109.443,80.292 109.243,80.252 U2.17@108.712,80.252 ; v1(111.094,91.555) 112.491,90.158 113.126,90.158 113.38,90.412 ; 113.38,90.393 RN4.1@113.38,92.717
  Bottom Layer w0.35: v1(48.737,91.047) 48.737,92.313 48.75,92.45 48.777,92.585 48.817,92.717 48.87,92.844 48.935,92.966 49.012,93.081 49.099,93.187 v1(49.626,93.714) ; v1(51.404,90.158) 51.404,78.76 51.482,78.57 51.628,78.425 51.817,78.347 55.849,78.347 ; v1(55.214,95.619) 56.211,94.622 56.298,94.515 56.375,94.401 56.44,94.279 56.493,94.152 56.533,94.02 56.56,93.885 56.573,93.748 RN2.8@56.573,88.818 ; 55.372,78.347 cw(c55.372,77.87) v1@55.849,77.87 ; v1(55.849,77.585) 55.849,78.22 ; v1(58.008,70.092) 62.472,65.628 62.578,65.541 62.693,65.464 62.815,65.399 62.942,65.346 63.074,65.306 63.209,65.279 63.346,65.266 100.041,65.266 100.178,65.279 100.313,65.306 100.445,65.346 100.572,65.399 100.694,65.464 100.809,65.541 100.915,65.628 108.319,73.032 108.406,73.138 108.483,73.253 108.548,73.375 108.601,73.502 108.641,73.634 108.667,73.769 108.681,73.906 108.681,84.185 108.694,84.322 108.721,84.457 108.761,84.589 108.814,84.716 108.879,84.838 108.956,84.953 109.043,85.059 v1(110.586,86.602) 110.9,86.916 110.995,87.058 111.061,87.216 111.094,87.384 v1(111.094,91.555) ; v1(70.2,75.172) 69.946,75.172 69.553,74.779 69.375,74.66 69.178,74.579 68.969,74.537 60.933,74.537 60.796,74.55 60.661,74.577 60.529,74.617 60.402,74.67 60.28,74.735 60.165,74.812 60.059,74.899 56.782,78.176 56.657,78.26 56.517,78.317 56.369,78.347 55.976,78.347 ; 55.849,78.22 55.976,78.347 ; 55.849,78.22 55.849,78.347 ; 55.849,78.347 55.976,78.347